# EAGLE board CT_schematic (EAGLE 7.6.0)

Size 100 x 80 mm. Coordinates in mm from the lower left corner, seen from the top.
Outline: 0,0 100,0 100,80 0,80 0,0
Copper layers (1*16): Top 0.035mm / dielectric 1.5mm / Bottom 0.035mm
Design rules "default": minimum track width 10mil, minimum drill 24mil, track to track 8mil, track to pad 8mil, pad to pad 8mil, via to via 8mil, smd to smd 8mil, copper to edge 40mil, drill to drill 8mil, minimum pad ring 10mil, minimum via ring 8mil, stop-mask expansion 4mil, vias tented up to drill 0mil, thermal gap 10mil

## Footprints (pad centres in the part's own frame; a part is rotated, then mirrored left to right if it is on the bottom)
C0603 = smd 0.8 x 0.8: 1 -0.762,0; 2 0.762,0
C0402 = smd 0.5 x 0.5: 1 -0.508,0; 2 0.508,0
C1210 = smd 1.2 x 2.5: 1 -1.524,0; 2 1.524,0
EXV-9H = smd 3.505 x 1.676: 1 -2.857,0; 2 2.857,0
PJ-037B_PACKAGE = drill 3.7 square: 1 12,0 | drill 3.2 square: 2 6,0
R0603 = smd 0.8 x 0.8: 1 -0.762,0; 2 0.762,0
UFBGA132 = smd 0.32 x 0.32: A1 -2.75,2.75; A2 -2.25,2.75; A3 -1.75,2.75; A4 -1.25,2.75; A5 -0.75,2.75; A6 -0.25,2.75; A7 0.25,2.75; A8 0.75,2.75; A9 1.25,2.75; A10 1.75,2.75; A11 2.25,2.75; A12 2.75,2.75; B1 -2.75,2.25; B2 -2.25,2.25; B3 -1.75,2.25; B4 -1.25,2.25; B5 -0.75,2.25; B6 -0.25,2.25; B7 0.25,2.25; B8 0.75,2.25; B9 1.25,2.25; B10 1.75,2.25; B11 2.25,2.25; B12 2.75,2.25; C1 -2.75,1.75; C2 -2.25,1.75; C3 -1.75,1.75; C4 -1.25,1.75; C5 -0.75,1.75; C6 -0.25,1.75; C7 0.25,1.75; C8 0.75,1.75; C9 1.25,1.75; C10 1.75,1.75; C11 2.25,1.75; C12 2.75,1.75; D1 -2.75,1.25; D2 -2.25,1.25; D3 -1.75,1.25; D4 -1.25,1.25; D5 -0.75,1.25; D6 -0.25,1.25; D7 0.25,1.25; D8 0.75,1.25; D9 1.25,1.25; D10 1.75,1.25; D11 2.25,1.25; D12 2.75,1.25; E1 -2.75,0.75; E2 -2.25,0.75; E3 -1.75,0.75; E4 -1.25,0.75; E9 1.25,0.75; E10 1.75,0.75; E11 2.25,0.75; E12 2.75,0.75; F1 -2.75,0.25; F2 -2.25,0.25; F3 -1.75,0.25; F4 -1.25,0.25; F6 -0.25,0.25; F7 0.25,0.25; F9 1.25,0.25; F10 1.75,0.25; F11 2.25,0.25; F12 2.75,0.25; G1 -2.75,-0.25; G2 -2.25,-0.25; G3 -1.75,-0.25; G4 -1.25,-0.25; G6 -0.25,-0.25; G7 0.25,-0.25; G9 1.25,-0.25; G10 1.75,-0.25; G11 2.25,-0.25; G12 2.75,-0.25; H1 -2.75,-0.75; H2 -2.25,-0.75; H3 -1.75,-0.75; H4 -1.25,-0.75; H9 1.25,-0.75; H10 1.75,-0.75; H11 2.25,-0.75; H12 2.75,-0.75; J1 -2.75,-1.25; J2 -2.25,-1.25; J3 -1.75,-1.25; J4 -1.25,-1.25; J5 -0.75,-1.25; J6 -0.25,-1.25; J7 0.25,-1.25; J8 0.75,-1.25; J9 1.25,-1.25; J10 1.75,-1.25; J11 2.25,-1.25; J12 2.75,-1.25; K1 -2.75,-1.75; K2 -2.25,-1.75; K3 -1.75,-1.75; K4 -1.25,-1.75; K5 -0.75,-1.75; K6 -0.25,-1.75; K7 0.25,-1.75; K8 0.75,-1.75; K9 1.25,-1.75; K10 1.75,-1.75; K11 2.25,-1.75; K12 2.75,-1.75; L1 -2.75,-2.25; L2 -2.25,-2.25; L3 -1.75,-2.25; L4 -1.25,-2.25; L5 -0.75,-2.25; L6 -0.25,-2.25; L7 0.25,-2.25; L8 0.75,-2.25; L9 1.25,-2.25; L10 1.75,-2.25; L11 2.25,-2.25; L12 2.75,-2.25; M1 -2.75,-2.75; M2 -2.25,-2.75; M3 -1.75,-2.75; M4 -1.25,-2.75; M5 -0.75,-2.75; M6 -0.25,-2.75; M7 0.25,-2.75; M8 0.75,-2.75; M9 1.25,-2.75; M10 1.75,-2.75; M11 2.25,-2.75; M12 2.75,-2.75
ETRX3587 = smd 1 x 1.4: 1 0,0; 2 1.27,0; 3 2.54,0; 4 3.81,0; 5 5.08,0; 6 6.35,0; 7 7.62,0; 8 8.89,0; 9 10.16,0; 10 11.43,0; 11 12.7,0; 12 13.97,0; 13 15.24,0; 14 16.51,0; 15 17.78,0; 16 19.05,0; 17 20.32,0; 18 21.59,0; 19 22.86,0; 20 22.86,18.8; 21 21.59,18.8; 22 20.32,18.8; 23 19.05,18.8; 24 17.78,18.8; 25 16.51,18.8; 26 15.24,18.8; 27 13.97,18.8; 28 12.7,18.8; 29 11.43,18.8; 30 10.16,18.8; 31 8.89,18.8; 32 7.62,18.8; 33 6.35,18.8
TDFN-8/6MM = smd 0.3 x 0.75: 1 0,0; 2 0.5,0; 3 1,0; 4 1.5,0; 5 1.5,3; 6 1,3; 7 0.5,3; 8 0,3
SSOP-28 = smd 1.5 x 0.4: 1 -3.625,4.225; 2 -3.625,3.575; 3 -3.625,2.925; 4 -3.625,2.275; 5 -3.625,1.625; 6 -3.625,0.975; 7 -3.625,0.325; 8 -3.625,-0.325; 9 -3.625,-0.975; 10 -3.625,-1.625; 11 -3.625,-2.275; 12 -3.625,-2.925; 13 -3.625,-3.575; 14 -3.625,-4.225; 15 3.625,-4.225; 16 3.625,-3.575; 17 3.625,-2.925; 18 3.625,-2.275; 19 3.625,-1.625; 20 3.625,-0.975; 21 3.625,-0.325; 22 3.625,0.325; 23 3.625,0.975; 24 3.625,1.625; 25 3.625,2.275; 26 3.625,2.925; 27 3.625,3.575; 28 3.625,4.225
HTSS-105-01-G-D = drill 1 pad 1.8 square: 1 0,0 | drill 1 pad 1.8: 2 0,2.54; 3 2.54,0; 4 2.54,2.54; 5 5.08,0; 6 5.08,2.54; 7 7.62,0; 8 7.62,2.54; 9 10.16,0; 10 10.16,2.54
ASEK = smd 1.4 x 1: 1 -1.1,-0.8; 2 1.1,-0.8; 3 1.1,0.8; 4 -1.1,0.8
ASFL1 = smd 1.7 x 1.5: 1 -1.27,-1.1; 2 1.27,-1.1; 3 1.27,1.1; 4 -1.27,1.1
WSON-8 = smd 0.3 x 0.6: 1 -0.75,0; 2 0.05,0; 3 0.85,0; 4 1.65,0; 5 1.65,3.8; 6 0.85,3.8; 7 0.05,3.8; 8 -0.75,3.8 | smd 3 x 2.6: PAD 0.45,1.9
SON-6 = smd 0.55 x 0.3: 1 -0.355,0.5 | smd 0.52 x 0.3: 2 -0.37,0; 3 -0.37,-0.5; 4 0.37,-0.5; 5 0.37,0; 6 0.37,0.5
SW_4-1437565-2 = smd 1.4 x 2.1: 1 -2.23,4.55; 2 -2.23,-4.55; 3 2.23,4.55; 4 2.23,-4.55
LGM67K-G1J2-24-Z = smd 0.8 x 1.4: A -2,0; C 0,0
NC7SZ125M5X = smd 1.3 x 0.7: 1 -1.3,0.95; 2 -1.3,0; 3 -1.3,-0.95; 4 1.3,-0.95; 5 1.3,0.95

## Placement (x,y rotation side)
C1  1e-07  [C0603]  -38.1,66.04 0 top  (outside the outline)
C2  1e-07  [C0603]  -41.91,66.04 0 top  (outside the outline)
C3  1e-07  [C0603]  -45.72,66.04 0 top  (outside the outline)
C4  1e-07  [C0603]  -49.53,66.04 0 top  (outside the outline)
C5  1e-07  [C0603]  -53.34,66.04 0 top  (outside the outline)
C6  1e-07  [C0603]  -57.15,66.04 0 top  (outside the outline)
C7  1e-07  [C0603]  -60.96,66.04 0 top  (outside the outline)
C8  4.7e-06  [C0603]  -34.29,66.04 0 top  (outside the outline)
C9  1e-07  [C0603]  -64.77,66.04 0 top  (outside the outline)
C10  1e-08  [C0603]  -68.58,66.04 0 top  (outside the outline)
C11  1e-06  [C0603]  -15.24,71.12 0 top  (outside the outline)
C12  1e-07  [C0402]  -49.53,71.12 0 top  (outside the outline)
C13  1e-08  [C0402]  -53.34,71.12 0 top  (outside the outline)
C14  1e-07  [C0402]  -57.15,71.12 0 top  (outside the outline)
C15  1e-07  [C0402]  -60.96,71.12 0 top  (outside the outline)
C16  1e-07  [C0402]  -64.77,71.12 0 top  (outside the outline)
C17  1e-07  [C0402]  -68.58,71.12 0 top  (outside the outline)
C18  1e-07  [C0402]  -15.24,76.2 0 top  (outside the outline)
C19  1e-08  [C0402]  -19.05,76.2 0 top  (outside the outline)
C20  1e-08  [C0402]  -22.86,76.2 0 top  (outside the outline)
C21  1e-08  [C0402]  -26.67,76.2 0 top  (outside the outline)
C22  1e-05  [C1210]  -29.21,59.69 0 top  (outside the outline)
C23  1e-05  [C1210]  -35.56,59.69 0 top  (outside the outline)
C24  1e-07  [C0402]  -30.48,76.2 0 top  (outside the outline)
C25  0.0001  [EXV-9H]  -55.88,52.07 0 top  (outside the outline)
C26  0.0001  [EXV-9H]  -67.31,52.07 0 top  (outside the outline)
C27  1e-08  [C0402]  -34.29,76.2 0 top  (outside the outline)
C28  1e-08  [C0402]  -38.1,76.2 0 top  (outside the outline)
J1  PJ-037B  [PJ-037B_PACKAGE]  -27.94,30.48 0 top  (outside the outline)
R2  1000.0  [R0603]  -19.05,71.12 0 top  (outside the outline)
R4  4700.0  [R0603]  -22.86,71.12 0 top  (outside the outline)
R5  4700.0  [R0603]  -26.67,71.12 0 top  (outside the outline)
R6  2200.0  [R0603]  -30.48,71.12 0 top  (outside the outline)
R7  2200.0  [R0603]  -34.29,71.12 0 top  (outside the outline)
R8  10000.0  [R0603]  -15.24,66.04 0 top  (outside the outline)
R9  10000.0  [R0603]  -20.32,66.04 0 top  (outside the outline)
R10  100000.0  [R0603]  -53.34,58.42 0 top  (outside the outline)
R11  100000.0  [R0603]  -58.42,58.42 0 top  (outside the outline)
R12  2231.0  [R0603]  -38.1,71.12 0 top  (outside the outline)
R13  1000.0  [R0603]  -41.91,71.12 0 top  (outside the outline)
R14  10000.0  [R0603]  -25.4,66.04 0 top  (outside the outline)
R15  10000.0  [R0603]  -30.48,66.04 0 top  (outside the outline)
R16  9100.0  [R0603]  -45.72,71.12 0 top  (outside the outline)
R17  680000.0  [R0603]  -63.5,58.42 0 top  (outside the outline)
R18  120000.0  [R0603]  -68.58,58.42 0 top  (outside the outline)
U1  STM32L162QDH6  [UFBGA132]  -60.96,29.21 0 top  (outside the outline)
U2  ETRX3587  [ETRX3587]  -48.26,1.27 0 top  (outside the outline)
U3  24AA08T-I/MNY  [TDFN-8/6MM]  -43.18,41.91 0 top  (outside the outline)
U4  ST3241EBPR  [SSOP-28]  -57.15,7.62 0 top  (outside the outline)
U5  HTSS-105-01-G-D  [HTSS-105-01-G-D]  -27.94,41.91 0 top  (outside the outline)
U6  ASEK-32.768KHz-ECST  [ASEK]  -46.99,52.07 0 top  (outside the outline)
U7  ASFL1-25MHZ-NCS  [ASFL1]  -26.67,52.07 0 top  (outside the outline)
U8  LP3878SDX-ADJ/NOPB  [WSON-8]  -63.5,40.64 0 top  (outside the outline)
U9  TPS3895ADRYR  [SON-6]  -40.64,74.93 0 top  (outside the outline)
U10  4-1437565-2  [SW_4-1437565-2]  -44.45,29.21 0 top  (outside the outline)
U11  Q65110A2395  [LGM67K-G1J2-24-Z]  -17.78,59.69 0 top  (outside the outline)
U12  nc7sz125m5x  [NC7SZ125M5X]  -40.64,58.42 0 top  (outside the outline)
U13  nc7sz125m5x  [NC7SZ125M5X]  -46.99,58.42 0 top  (outside the outline)

## Library data of the parts
C1-C28 J1 R2 R4-R18 U1-U13 = circuit_tree

## Nets
CLK_U1_D1: U1.D1 U6.3
CLK_U1_F1: U1.F1 U7.3
GND: C1.2 C2.2 C3.2 C4.2 C5.2 C6.2 C7.2 C8.2 C9.2 C10.2 C11.2 C12.2 C13.2 C14.2 C17.2 C18.2 C19.2 C20.2 C21.2 C22.2 C23.2 C24.2 C25.2 C26.2 C27.2 C28.2 J1.2 R2.2 R8.2 R9.2 R13.2 R16.2 R18.2 U1.D3 U1.E3 U1.F2 U1.F6 U1.F7 U1.F11 U1.F12 U1.J1 U2.1 U2.13 U2.19 U2.20 U2.31 U2.33 U3.4 U4.23 U4.25 U5.9 U6.2 U7.2 U8.3 U8.PAD U9.2 U11.C U12.1 U12.3 U13.1 U13.3
NET_U1_A3: R6.1 U1.A3 U3.6
NET_U1_A4: R8.1 U1.A4
NET_U1_B3: R7.1 U1.B3 U3.5
NET_U1_E2: C9.1 U1.E2
NET_U1_H2: R5.1 U1.H2 U13.4
NET_U1_M11: U11.A
NET_U1_M12: U10.3 U10.4
NET_U2_7: R4.1 U2.7 U12.4
NET_U2_21: R9.1 U2.21
NET_U4_1: C16.1 U4.1
NET_U4_2: C16.2 U4.2
NET_U4_3: C18.1 U4.3
NET_U4_22: R10.1 U4.22
NET_U4_24: C15.2 U4.24
NET_U4_27: C17.1 U4.27
NET_U4_28: C15.1 U4.28
NET_U5_3: U4.4 U5.3
NET_U5_4: U4.5 U5.4
NET_U5_5: U4.9 U5.5
NET_U5_6: U4.10 U5.6
NET_U8_1: C21.1 U8.1
NET_U8_6: R12.2 R13.1 U8.6
NET_U8_8: R11.1 U8.8
NET_U9_1: R15.1 R16.1 U9.1
NET_U9_3: R17.2 R18.1 U9.3
NET_U9_4: R14.1 U9.4 U12.2 U13.2
NET_U10_1: R2.1 U10.1 U10.2
PROC_UART4_RX: U1.C10 U2.17
PROC_UART4_TX: U1.B11 U2.18
PROC_UART5_RX: U1.C8 U4.19
PROC_UART5_TX: U1.B10 U4.14
VCC_S1_14V8: C22.1 C25.1 C26.1 J1.1 R11.2 U8.4
VCC_TIER1_3V3: C1.1 C2.1 C3.1 C4.1 C5.1 C6.1 C7.1 C8.1 C10.1 C11.1 C12.1 C13.1 C14.1 C19.1 C20.1 C23.1 C24.1 C27.1 C28.1 R4.2 R5.2 R6.2 R7.2 R10.2 R12.1 R14.2 R15.2 R17.1 U1.C4 U1.G2 U1.G6 U1.G7 U1.G11 U1.G12 U1.H3 U1.L1 U1.M1 U2.32 U3.7 U3.8 U4.26 U6.4 U7.4 U8.5 U9.6 U12.5 U13.5

## Tracks (layer width: path | path; a pad name or v marks a point on that pad's centre or on a via)
CLK_U1_D1  (1 unrouted)
CLK_U1_F1  (1 unrouted)
GND  (60 unrouted)
NET_U1_A3  (2 unrouted)
NET_U1_A4  (1 unrouted)
NET_U1_B3  (2 unrouted)
NET_U1_E2  (1 unrouted)
NET_U1_H2  (2 unrouted)
NET_U1_M12  (1 unrouted)
NET_U2_7  (2 unrouted)
NET_U2_21  (1 unrouted)
NET_U4_1  (1 unrouted)
NET_U4_2  (1 unrouted)
NET_U4_3  (1 unrouted)
NET_U4_22  (1 unrouted)
NET_U4_24  (1 unrouted)
NET_U4_27  (1 unrouted)
NET_U4_28  (1 unrouted)
NET_U5_3  (1 unrouted)
NET_U5_4  (1 unrouted)
NET_U5_5  (1 unrouted)
NET_U5_6  (1 unrouted)
NET_U8_1  (1 unrouted)
NET_U8_6  (2 unrouted)
NET_U8_8  (1 unrouted)
NET_U9_1  (2 unrouted)
NET_U9_3  (2 unrouted)
NET_U9_4  (3 unrouted)
NET_U10_1  (2 unrouted)
PROC_UART4_RX  (1 unrouted)
PROC_UART4_TX  (1 unrouted)
PROC_UART5_RX  (1 unrouted)
PROC_UART5_TX  (1 unrouted)
VCC_S1_14V8  (5 unrouted)
VCC_TIER1_3V3  (46 unrouted)